# Allegro board codec_board_v1_160DRC.brd
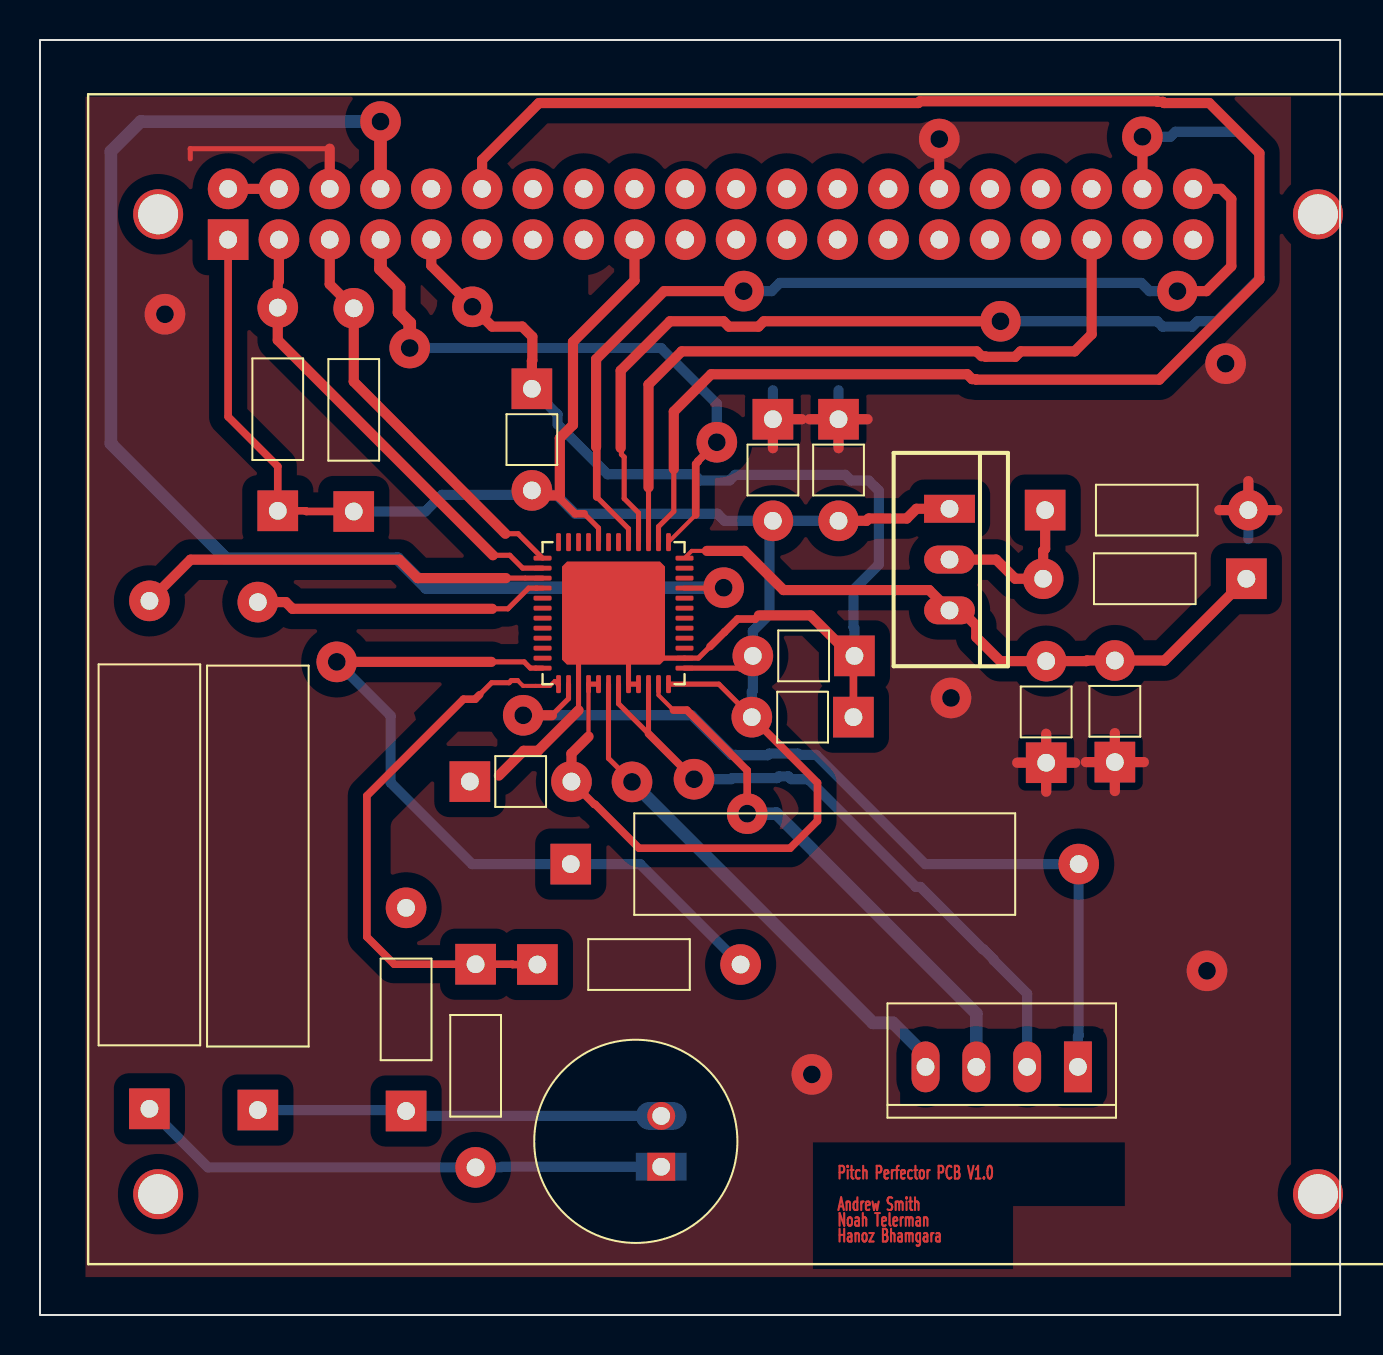
[diagram p0: board, top side]
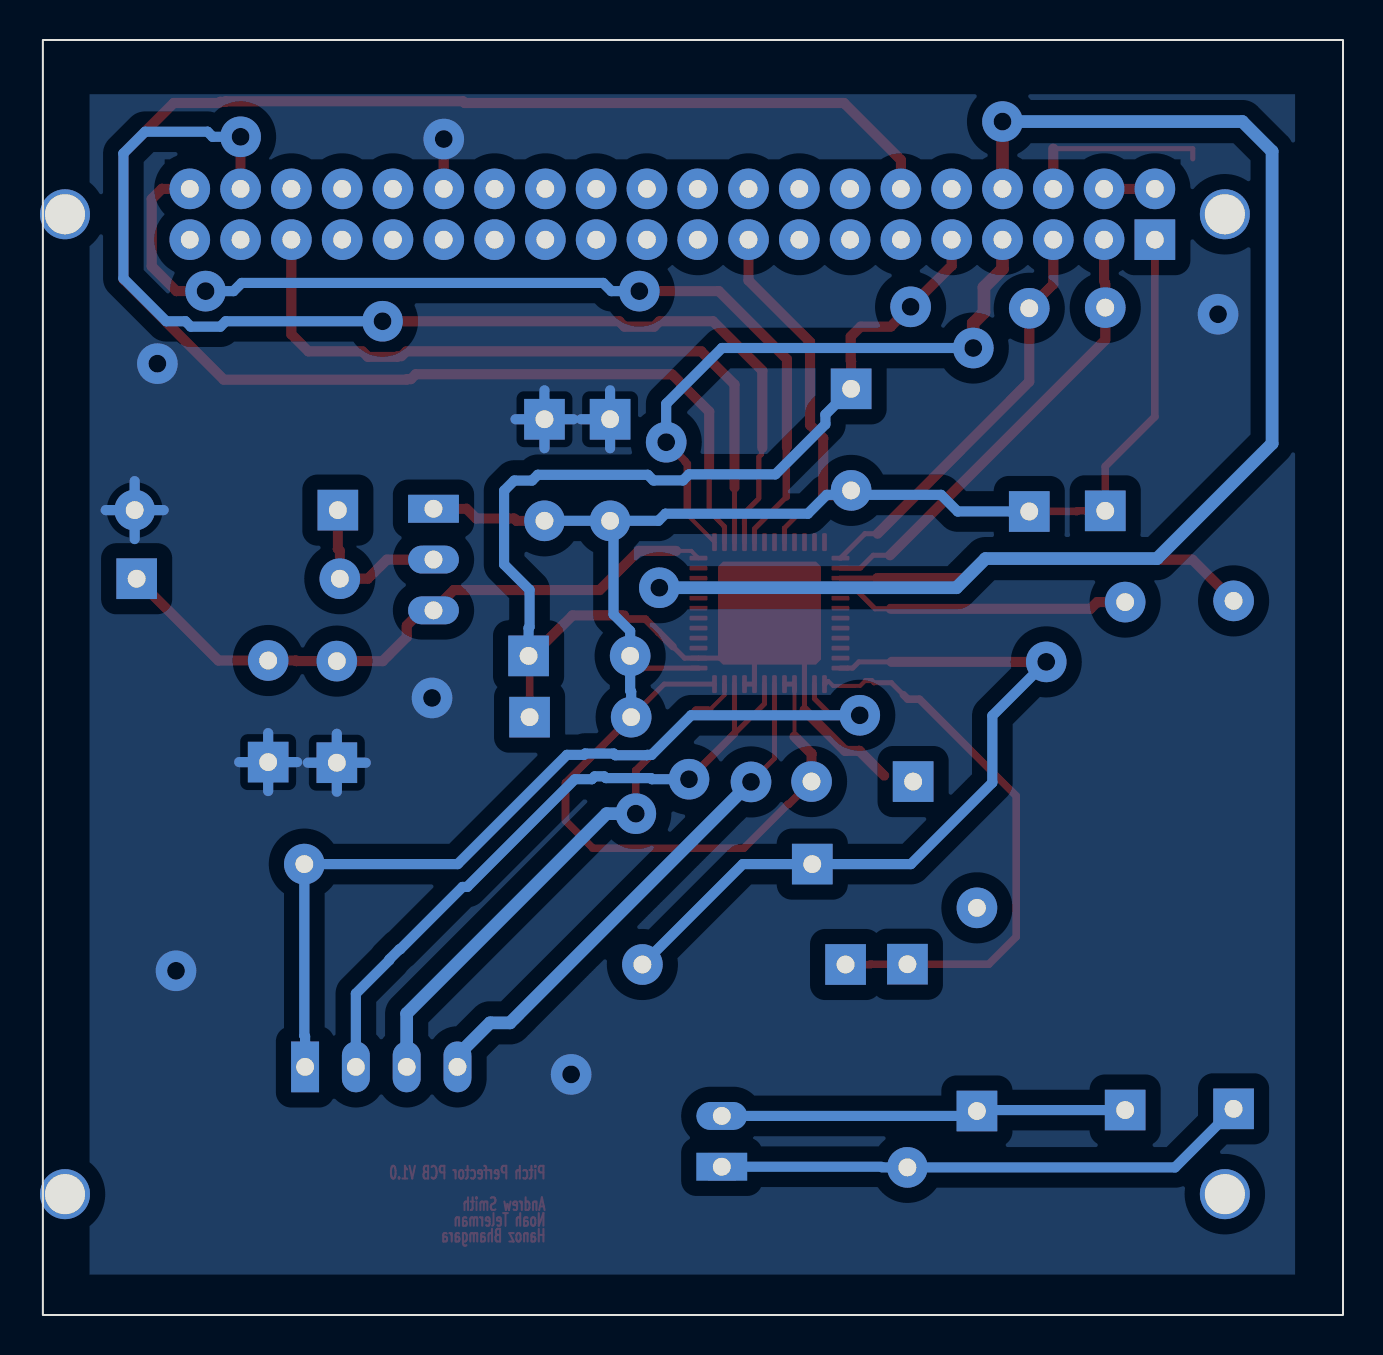
[diagram p1: board, bottom side, seen from below]

Outline 65.01 x 63.76 mm; copper layers: TOP, BOTTOM. Coordinates in mm from the lower left corner of the outline.
Outline path: rectangle 0,0 65.01,63.76

## Design rules (mm)
constraint set DEFAULT: min track width 0.508, pair gap 0.203

## Placement (name value [footprint] x y rotation side)
C1  0.47uF  [GU-RC1000]  5.47 10.31 90 top
C2  0.47uF  [GU-RC1000]  10.89 10.25 90 top
C3  1uF  [GU-RC200]  39.93 44.79 270 top
C4  1uF  [GU-RC200]  36.65 44.79 270 top
C5  1uF  [GU-RC200]  50.31 27.62 90 top
C6  1uF  [GU-RC200]  53.75 27.65 90 top
C9  0.47uF  [GU-RC1000]  26.54 22.55 0 top
C10  1uF  [GU-RC200]  21.5 26.68 0 top
C11  1uF  [GU-RC200]  40.68 29.9 180 top
C12  1uF  [GU-RC200]  40.73 32.96 180 top
C13  1uF  [GU-RC200]  24.6 46.31 270 top
J1  TLV320AIC33  [QFN49P50_700X700X100L40X24T515]  28.68 35.1 270 top
J3  Mic  [GU-MIC100]  31.06 7.41 180 top
R1  1k  [GU-RC400]  21.78 17.54 270 top
R2  1k  [GU-RC400]  18.31 10.2 90 top
R3  10k  [GU-RC400]  15.69 40.18 90 top
R4  10k  [GU-RC400]  11.89 40.21 90 top
R5  2k  [GU-RC400]  24.87 17.53 0 top
R6  1k  [GU-RC400]  60.32 36.82 180 top
R7  1k  [GU-RC400]  50.26 40.25 0 top
U1  Raspberry Pi B+  [GU-RASP-PI-3]  2.41 2.54 0 top
U2  Aux Out  [GU-MOLEX4]  51.9 12.41 270 top
U4  LM317_H  [GU-TO220AB]  45.48 40.31 270 top

## Library data of the parts
C1-C6 C9-C13 = CAP NP
J1 = CON50A_2
J3 = CON2
R1-R7 = RESISTOR
U1 = Raspberry Pi B+_0
U2 = 2MMCONN4
U4 = LM317_H

## Footprints (pads in the part's own frame, mm; a bottom-side part is the same pattern mirrored in y, then rotated)
GU-MIC100
  rect 1.397x1.397 hole 0.889: 1(0,0)
  round 1.397 hole 0.889: 2(0,-2.54)
GU-MOLEX4
  rect 2.54x1.397 hole 0.889: 1(0,0)
  oval 2.54x1.397 hole 0.889: 2(0,-2.54) 3(0,-5.08) 4(0,-7.62)
GU-RASP-PI-3
  round 2.5 hole 2 unplated: (3.5,52.5) (3.5,3.5) (61.5,52.5) (61.5,3.5)
  rect 2.032x2.032 hole 0.889: 1(7,51.23)
  round 2.032 hole 0.889: 2(7,53.77) 3(9.54,51.23) 4(9.54,53.77) 5(12.08,51.23) 6(12.08,53.77) 7(14.62,51.23) 8(14.62,53.77) 9(17.16,51.23) 10(17.16,53.77) 11(19.7,51.23) 12(19.7,53.77) 13(22.24,51.23) 14(22.24,53.77) 15(24.78,51.23) 16(24.78,53.77) 17(27.32,51.23) 18(27.32,53.77) 19(29.86,51.23) 20(29.86,53.77) 21(32.4,51.23) 22(32.4,53.77) 23(34.94,51.23) 24(34.94,53.77) 25(37.48,51.23) 26(37.48,53.77) 27(40.02,51.23) 28(40.02,53.77) 29(42.56,51.23) 30(42.56,53.77) 31(45.1,51.23) 32(45.1,53.77) 33(47.64,51.23) 34(47.64,53.77) 35(50.18,51.23) 36(50.18,53.77) 37(52.72,51.23) 38(52.72,53.77) 39(55.26,51.23) 40(55.26,53.77)
GU-RC200
  rect 2.032x2.032 hole 0.889: 1(0,0)
  round 2.032 hole 0.889: 2(5.08,0)
GU-RC400
  rect 2.032x2.032 hole 0.889: 1(0,0)
  round 2.032 hole 0.889: 2(10.16,0)
GU-RC1000
  rect 2.032x2.032 hole 0.889: 1(0,0)
  round 2.032 hole 0.889: 2(25.4,0)
GU-TO220AB
  rect 1.397x2.54 hole 0.889: 1(0,0)
  oval 1.397x2.54 hole 0.889: 2(2.54,0) 3(5.08,0)
QFN49P50_700X700X100L40X24T515
  rrect 0.24x0.9 smd: 1(-2.75,-3.55) 2(-2.25,-3.55) 3(-1.75,-3.55) 4(-1.25,-3.55) 5(-0.75,-3.55) 6(-0.25,-3.55) 7(0.25,-3.55) 8(0.75,-3.55) 9(1.25,-3.55) 10(1.75,-3.55) 11(2.25,-3.55) 12(2.75,-3.55) 25(2.75,3.55) 26(2.25,3.55) 27(1.75,3.55) 28(1.25,3.55) 29(0.75,3.55) 30(0.25,3.55) 31(-0.25,3.55) 32(-0.75,3.55) 33(-1.25,3.55) 34(-1.75,3.55) 35(-2.25,3.55) 36(-2.75,3.55)
  rrect 0.9x0.24 smd: 13(3.55,-2.75) 14(3.55,-2.25) 15(3.55,-1.75) 16(3.55,-1.25) 17(3.55,-0.75) 18(3.55,-0.25) 19(3.55,0.25) 20(3.55,0.75) 21(3.55,1.25) 22(3.55,1.75) 23(3.55,2.25) 24(3.55,2.75) 37(-3.55,2.75) 38(-3.55,2.25) 39(-3.55,1.75) 40(-3.55,1.25) 41(-3.55,0.75) 42(-3.55,0.25) 43(-3.55,-0.25) 44(-3.55,-0.75) 45(-3.55,-1.25) 46(-3.55,-1.75) 47(-3.55,-2.25) 48(-3.55,-2.75)
  rrect 5.15x5.15 smd: 49(0,0)

## Nets
1.9V: C5.2 C6.2 J1.36 R6.1 U4.3(OUT)
3V3: C3.2 C4.2 C10.2 C11.2 C12.2 C13.2 J1.16 J1.17 J1.24 J1.25 J1.44 R3.1 R4.1 U1.1 U1.17 U4.1
5V: U1.2 U1.4(P5V#4)
AGND: C10.1 C11.1 C12.1 C13.1 J1.15 J1.20 J1.21 J1.26 J1.49 R2.2 U1.9 U1.25 U1.34 U1.39
DGND: C3.1 C4.1 C5.1 C6.1 J1.42 J1.43 R7.2 U1.6 U1.14 U1.20 U1.30
/RESET: J1.33 U1.8
BCLK: J1.38 U1.12
DIN: J1.40 U1.38
DOUT: J1.41 U1.40
HPCOM: J1.19 J1.22 U2.2
HPLOUT: J1.18 U2.4
HPROUT: J1.23 U2.3
LINE1LM: C2.2 J1.4
LINE1LP: C1.2 J1.3
MCLK: J1.37 U1.7
MIC3R: C9.2 J1.14 U2.1
MICBIAS: J1.13 R1.1 R5.1
MICDET: C9.1 J1.12 R5.2
SCL: J1.1 R3.2 U1.5
SDA: J1.2 R4.2 U1.3
WCLK: J1.39 U1.35
N00434: C1.1 J3.1 R1.2
N00441: C2.1 J3.2 R2.1
N13170: R6.2 R7.1 U4.2

Pads without a net: J1 5 6 7 8 9 10 11 27 28 29 30 31 32 34 35 45 46 47 48; U1 10 11 13 15 16 18 19 21 22 23 24 26 27 28 29 31 32 33 36 37

## Via types
v1: diameter 2.032, hole 0.889, TOP to BOTTOM, 20 vias

## Routing (per net, layer and track width the routed paths; a pad name or vN(x,y) marks a point on that pad's centre or on a via; arc(x,y) is an arc through that point)
1.9V: length 32.6
  TOP w0.203: J1.36 32.59,38.21 33.35,38.21
  TOP w0.508: 33.35,38.21 35.22,38.21 37.18,36.25 44.47,36.25 U4.3 46.05,35.23 46.82,34.47 46.82,33.9 48.02,32.7 C5.2 52.32,32.7 52.35,32.73 C6.2 56.24,32.73 R6.1
3V3: length 113.9
  TOP w0.203: J1.16 27.43,28.93
  TOP w0.254: 27.21,40.07 27.93,39.35 J1.44 ; J1.24 33.94,31.55 C11.2 ; J1.16 J1.17 ; J1.25 35.03,32.35
  TOP w0.381: R3.1 13.32,40.18 13.29,40.21 R4.1 11.89,42.44 9.41,44.92 U1.1 ; 27.21,40.07 26.76,40.07 25.99,40.84 25.99,40.98 ; 35.03,32.35 C12.2 ; C11.2 38.88,26.61 38.88,24.71 37.51,23.34 29.95,23.34 27.76,25.54 27.72,25.54 C10.2
  TOP w0.508: C3.2 41.33,39.71 41.45,39.83 43.35,39.83 43.83,40.31 U4.1 ; U1.17 29.73,51.73 26.65,48.66 26.65,44.51 25.99,43.85 25.99,40.98 24.85,40.98 C13.2 ; 27.43,28.93 26.58,28.07 C10.2
  BOTTOM w0.508: C11.2 35.6,31.17 35.65,31.22 C12.2 35.65,34.2 36.48,35.04 36.48,39.54 C4.2 ; C4.2 C3.2 ; C4.2 34.23,39.71 33.88,40.07 26.76,40.07 25.82,41.01 20.1,41.01 19.27,40.18 R3.1
5V: length 2.5
  TOP w0.508: U1.2 U1.4
AGND: length 71.2
  TOP w0.254: 26.93,30.24 J1.15 26.93,33.07 27.42,33.56 27.42,33.84 ; 33.5,33.43 32.93,32.85 J1.26 30.93,32.85 ; 29.43,34.35 J1.20 J1.21
  TOP w0.381: 27.42,33.84 J1.49 30.93,32.85 ; 35.95,34.98 35.77,34.8 34.88,34.8 34.24,34.15 34.23,34.15 33.5,33.43 ; C11.1 40.68,32.84 40.64,32.87 C12.1
  TOP w0.508: 35.95,34.98 38.53,34.98 40.64,32.87 ; 22.95,26.97 24.18,28.21 24.9,28.21 26.93,30.24 ; U1.9 19.57,52.47 v1(21.62,50.41) 22.61,49.43 24.11,49.43 24.62,48.92 24.62,47.73 24.6,47.71 C13.1
  BOTTOM w0.508: C12.1 40.73,34.36 40.68,34.4 40.68,36.26 41.95,37.53 41.95,41.22 41.44,41.73 40.55,41.73 40.27,42.01 34.76,42.01 34.48,41.73 33.01,41.73 32.7,42.04 28.38,42.04 25.88,44.54 25.88,45.03 C13.1
DGND: length 62.8
  TOP w0.254: v1(44.97,58.8) 45.05,58.89 ; 14.49,58.32 7.51,58.32 7.51,57.81
  TOP w0.508: 50.31,26.17 C5.1 ; C5.1 51.76,27.62 ; C5.1 48.87,27.62 ; C5.1 50.31,29.07 ; U1.6 14.49,58.32 ; R7.2 60.42,41.7 ; R7.2 58.98,40.25 ; R7.2 61.87,40.25 ; C6.1 53.75,29.1 ; C6.1 53.75,26.2 ; C6.1 55.2,27.65 ; C6.1 52.3,27.65 ; 36.65,43.34 C4.1 38.1,44.79 ; 39.93,43.34 C3.1 ; C3.1 41.38,44.79 ; C3.1 38.48,44.79 ; U1.30 v1(44.97,58.8)
  BOTTOM w0.508: C5.1 51.76,27.62 ; C5.1 50.31,26.17 ; C5.1 48.87,27.62 ; C5.1 50.31,29.07 ; C3.1 41.38,44.79 ; C3.1 39.93,43.34 ; C3.1 38.48,44.79 ; C3.1 39.93,46.24 ; C4.1 38.1,44.79 ; C4.1 36.65,46.24 ; C4.1 36.65,43.34 ; 52.3,27.65 C6.1 ; C6.1 53.75,29.1 ; C6.1 53.75,26.2 ; C6.1 55.2,27.65 ; R7.2 60.42,41.7 ; R7.2 61.87,40.25 ; R7.2 58.98,40.25 ; R7.2 60.42,38.8
  vias: v1(6.25,50.04) v1(38.6,12.03) v1(45.55,30.86) v1(58.36,17.21) v1(59.29,47.57)
/RESET: length 67.7
  TOP w0.254: J1.33 34.17,36.35
  TOP w0.508: 34.17,36.35 v1(34.19,36.37)
  TOP w0.635: v1(17.03,59.68) U1.8
  BOTTOM w0.635: v1(17.03,59.68) 5.03,59.68 3.55,58.19 3.55,43.58 9.3,37.82 17.88,37.82 19.33,36.37 v1(34.19,36.37)
BCLK: length 88
  TOP w0.254: 31.69,42.3 31.69,40.19 30.93,39.42 J1.38
  TOP w0.508: U1.12 22.11,57.76 24.95,60.6 43.92,60.6 44.01,60.69 55.86,60.69 55.89,60.67 56.15,60.67 56.21,60.6 58.47,60.6 60.97,58.1 60.97,51.78 55.97,46.77 46.82,46.77 46.79,46.8 46.61,46.8 46.37,47.04 33.56,47.04 31.69,45.17 31.69,42.3
DIN: length 58.5
  TOP w0.254: 29.04,43.36 29.08,43.32 29.08,43.04 29.21,42.9 29.21,40.83 29.93,40.11 29.93,39.03 J1.40
  TOP w0.508: 29.04,43.36 29.04,47.22 31.51,49.69 34.18,49.69 34.45,49.42 35.93,49.42 36.2,49.69 v1(48.03,49.69) ; v1(55.13,58.92) U1.38
  BOTTOM w0.508: v1(55.13,58.92) 56.52,58.92 56.78,59.17 59.9,59.17 60.99,58.08 60.99,51.84 58.84,49.69 57.89,49.69 57.61,49.42 56.14,49.42 55.87,49.69 v1(48.03,49.69)
DOUT: length 49.3
  TOP w0.254: 27.84,40.91 29.43,39.32 J1.41
  TOP w0.381: 27.81,43.41 27.84,43.37 27.84,40.91
  TOP w0.508: U1.40 59.06,56.31 59.57,55.8 59.57,52.44 58.33,51.2 v1(56.88,51.2) ; 27.81,43.41 27.81,47.8 31.21,51.2 v1(35.19,51.2)
  BOTTOM w0.508: v1(35.19,51.2) 36.59,51.2 37,51.61 55.07,51.61 55.48,51.2 v1(56.88,51.2)
HPCOM: length 33.7
  TOP w0.254: J1.19 28.93,30.57 30.43,29.07 J1.22
  TOP w0.381: v1(32.71,26.79) 30.43,29.07
  BOTTOM w0.508: v1(32.71,26.79) 34.55,26.79 34.61,26.85 36.86,26.85 36.94,26.93 37.42,26.93 37.56,26.79 38.41,26.79 43.8,21.4 44.03,21.4 47.14,18.29 47.18,18.29 47.69,17.78 47.69,17.75 49.36,16.07 U2.2
HPLOUT: length 26.3
  TOP w0.254: J1.18 28.43,31.31 28.43,30.85 28.43,27.83 v1(29.6,26.66)
  BOTTOM w0.635: v1(29.6,26.66) 41.65,14.61 42.65,14.61 44.28,12.98 U2.4
HPROUT: length 27
  TOP w0.203: 31.68,30.25 30.93,30.99 J1.23
  TOP w0.381: v1(35.36,25.07) 35.36,27.23 32.35,30.25 31.68,30.25
  BOTTOM w0.635: U2.3 46.82,15.07 36.82,25.07 v1(35.36,25.07)
LINE1LM: length 14.8
  TOP w0.254: 22.61,35.31 23.4,35.31 24.43,36.35 24.81,36.35 J1.4
  TOP w0.508: C2.2 12.29,35.65 12.63,35.31 22.61,35.31
LINE1LP: length 20.9
  TOP w0.254: 23.3,36.85 24.26,36.85 J1.3
  TOP w0.508: C1.2 7.53,37.77 17.97,37.77 18.89,36.85 23.3,36.85
MCLK: length 30.5
  TOP w0.203: 32.79,40.01 J1.37
  TOP w0.381: v1(33.84,43.64) 32.9,42.7 32.9,42.67 32.79,42.55 32.79,40.01
  TOP w0.635: U1.7 17.03,52.31 17.96,51.38 17.96,50.13 18.49,49.6 v1(18.49,48.35)
  BOTTOM w0.508: v1(33.84,43.64) 33.84,45.57 31.06,48.35 v1(18.49,48.35)
MIC3R: length 44.4
  TOP w0.254: J1.14 26.43,30.82 25.6,29.99
  TOP w0.508: v1(24.17,29.99) 25.6,29.99
  BOTTOM w0.508: U2.1 51.9,13.93 51.94,13.97 C9.2 44.27,22.55 38.81,28.01 37.96,28.01 37.9,28.08 36.47,28.08 36.38,27.99 34.81,27.99 34.79,28.01 34.57,28.01 32.59,29.99 v1(24.17,29.99)
MICBIAS: length 28.4
  TOP w0.203: 25.9,31.55 25.74,31.7 25.5,31.46 24.79,31.46 24.15,31.46 23.88,31.73
  TOP w0.254: 25.9,31.55 J1.13 ; 23.88,31.73 23.57,31.73 23.46,31.62 22.58,31.62 21.99,31.02
  TOP w0.381: 21.99,31.02 21.76,30.79 21.18,30.79 16.34,25.96 16.34,18.91 17.71,17.54 R1.1 23.61,17.54 23.63,17.53 R5.1
MICDET: length 38.8
  TOP w0.254: J1.12 24.79,32.35 24.52,32.35 24.21,32.66 22.57,32.66
  TOP w0.508: 22.57,32.66 v1(14.84,32.66)
  BOTTOM w0.508: v1(14.84,32.66) 17.54,29.96 17.54,26.62 21.61,22.55 C9.1 30.01,22.55 R5.2
SCL: length 20.7
  TOP w0.254: J1.1 23.91,39.07 23.27,39.07
  TOP w0.508: U1.5 14.49,51.54 R3.2 15.69,46.67 23.27,39.07
SDA: length 23
  TOP w0.254: 22.65,37.99 23.49,37.99 24.14,37.35 J1.2
  TOP w0.381: 11.95,51.68 11.89,51.62
  TOP w0.508: U1.3 11.95,51.68 ; 11.89,51.62 R4.2 11.89,48.75 22.65,37.99
WCLK: length 36
  TOP w0.254: J1.39 30.43,41.39 ; 47.08,47.94 47.26,47.94
  TOP w0.508: U1.35 52.59,49.04 51.73,48.19 49.04,48.19 48.77,47.91 47.29,47.91 47.26,47.94 ; 30.43,41.39 30.43,46.53 32.09,48.19 46.84,48.19 47.08,47.94
N00434: length 26.8
  BOTTOM w0.381: 23.05,7.38 23.09,7.41
  BOTTOM w0.508: 23.05,7.38 R1.2 8.4,7.38 C1.1 ; 23.09,7.41 J3.1
N00441: length 20.3
  BOTTOM w0.508: J3.2 18.55,9.95 R2.1 18.26,10.25 C2.1
N13170: length 8.6
  TOP w0.508: R7.1 50.26,38.31 50.17,38.21 R6.2 48.77,36.82 47.81,37.77 U4.2

## Copper pours and planes (outline as drawn; the poured copper is in the pictures)
DGND on TOP: 2.28,60.92 62.56,60.92 62.56,1.9 2.28,1.9 ; 33 cut-outs
DGND on BOTTOM: 2.4,61.05 62.68,61.05 62.68,2.02 2.4,2.02

## Text on the board
TOP: Pitch Perfector PCB V1.0 | Andrew Smith | Noah Telerman | Hanoz Bhamgara
